# Altium PCB PCB_Mechanicals.PcbDoc
Units mil, origin at the board's own origin, x right, y up, seen from the top; angles counter-clockwise.
Board outline 6000 x 4000 mil, 2 copper layers (Top Layer, Bottom Layer); 45 components, 27 nets, 103 pads, 0 vias.
Unrouted connection lines stored in the file: 4.
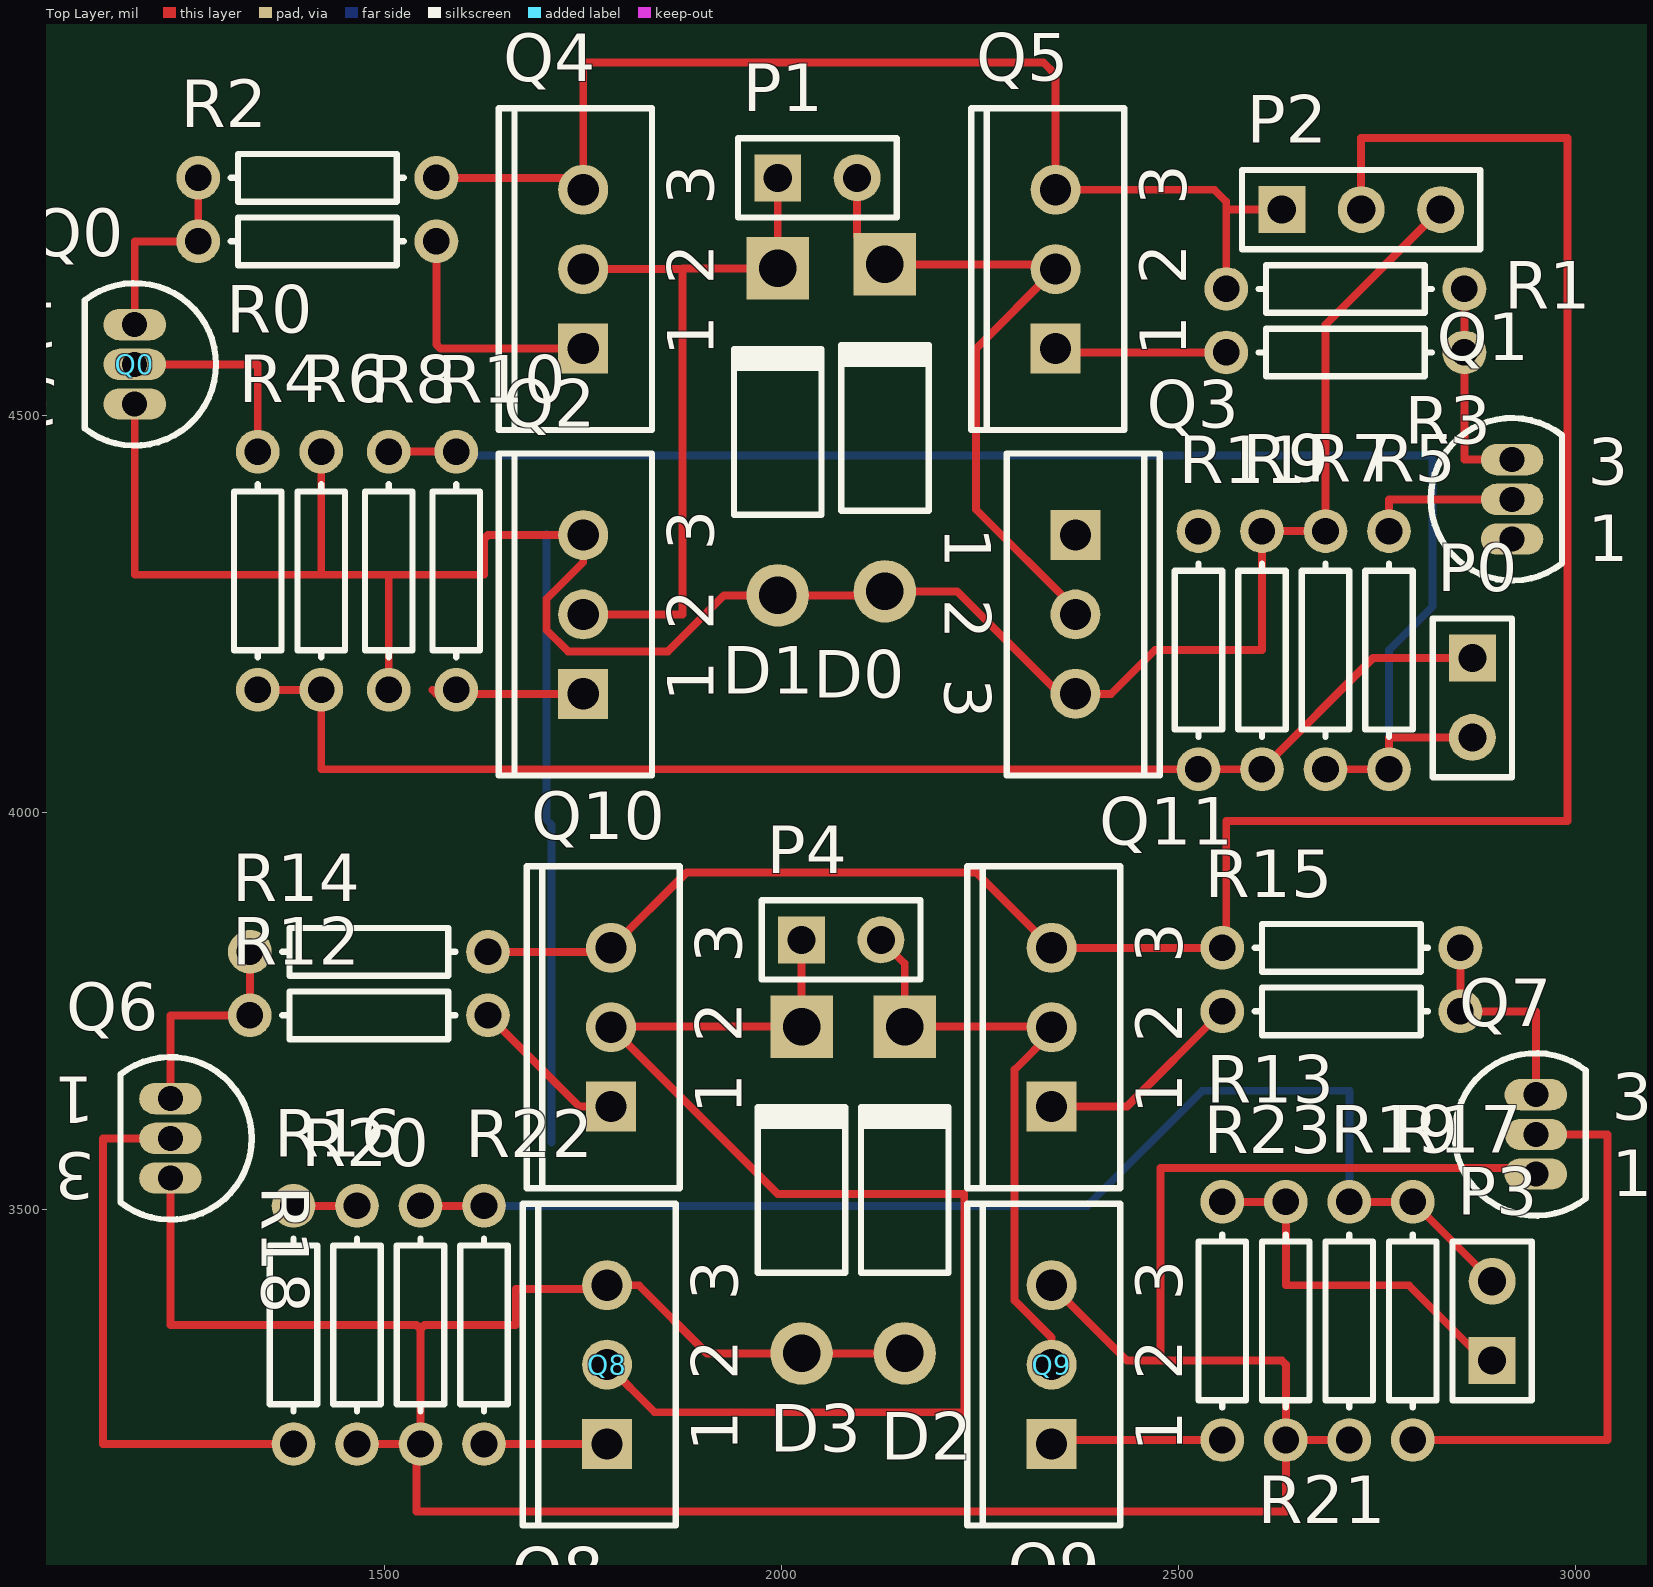
[diagram p0: Top Layer view]
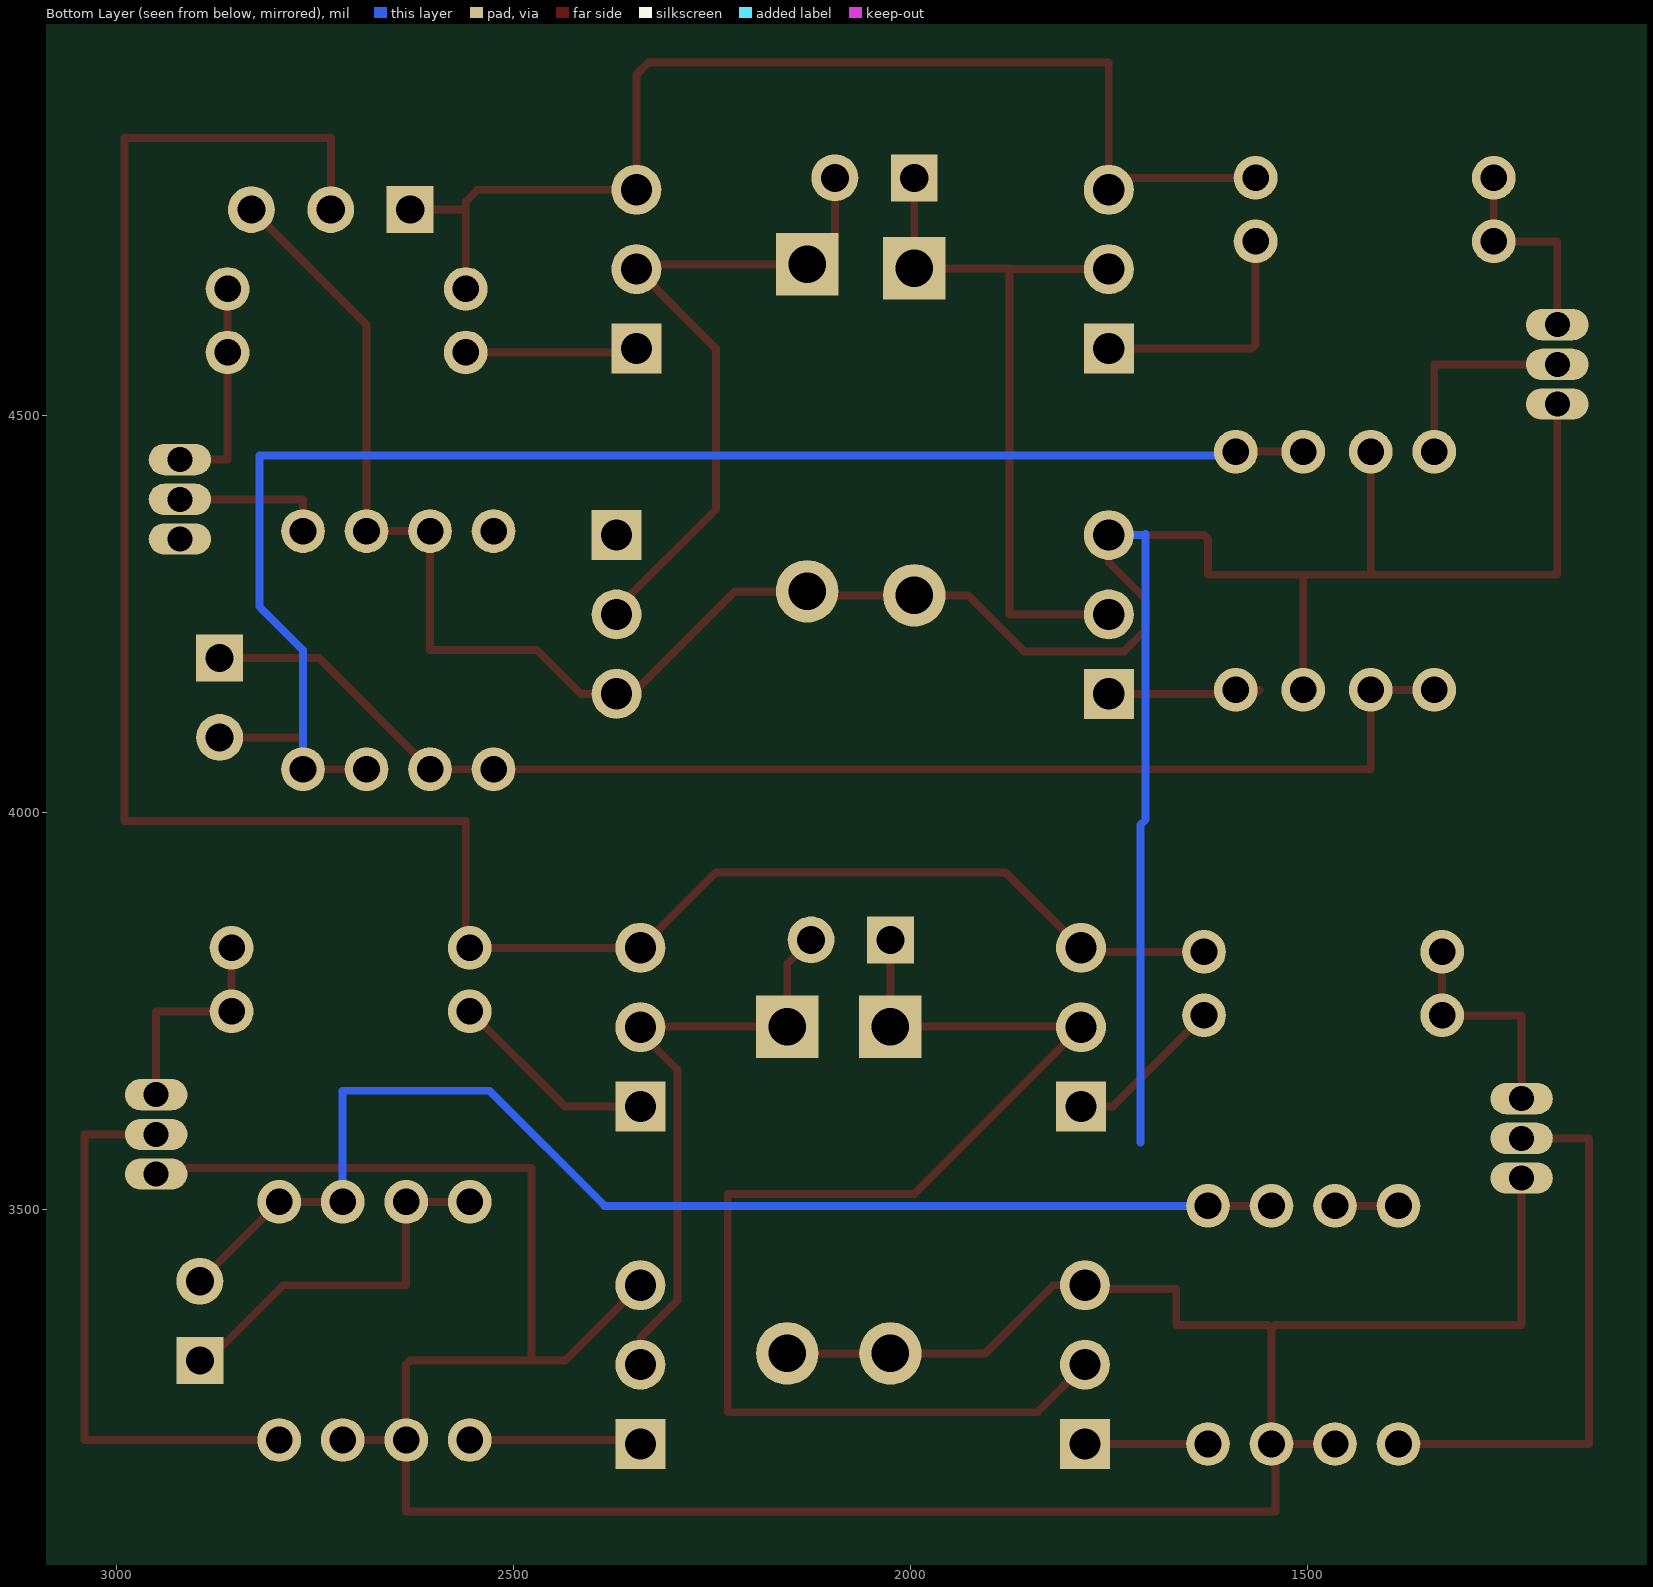
[diagram p1: Bottom Layer view, seen from below]

## Layer stack, top to bottom
Top Solder: solder mask 0.4, Solder Resist, Dk 3.5
Top Layer: signal copper 1.4
Dielectric 1: dielectric 12.6, FR-4, Dk 4.8
Bottom Layer: signal copper 1.4
Bottom Solder: solder mask 0.4, Solder Resist, Dk 3.5

## Board outline
1000,1000 7000,1000 7000,5000 1000,5000

## Design rules (kind name [scope] priority, off if disabled: settings)
Clearance [All] p1: gap=10
PolygonConnect [All] p1: connectstyle=Relief reliefconductorwidth=10 reliefentries=4 polygonreliefangle="90 Angle" airgapwidth=10
RoomDefinition SheetMechanicals [InComponentClass('SheetMechanicals')] p1: confinementstyle=ConfineIn formatcopy=TRUE lockcomponents=FALSE outline 995,2920 3110,2920 3110,4995 995,4995
RoutingVias [All] p1: holewidth=28 width=50 viastyle="Through Hole" minholewidth=28 minwidth=50 maxholewidth=28 maxwidth=50
SolderMaskExpansion [All] p1: expansion=4
Width [All] p1: maxlimit=10 minlimit=10 preferedwidth=10
29 further rules are at their usual default settings.

## Components (designator, comment, footprint, x,y, rotation, side; value= is the part's Value field where it differs from the comment)
D0 "Diode 1N4007" DO-41 2130,4485 r90 top
D1 "Diode 1N4007" DO-41 1995,4480 r90 top
D2 "Diode 1N4007" DO-41 2155,3525 r90 top
D3 "Diode 1N4007" DO-41 2025,3525 r90 top
P0 "Header 1" HDR1X2 2870,4195 r270 top
P1 "Header 2" HDR1X2 1995,4800 r0 top
P2 "Header 3" HDR1X3 2630,4760 r0 top
P3 "Header 4" HDR1X2 2895,3310 r90 top
P4 "Header 5" HDR1X2 2025,3840 r0 top
Q0 "BC337-16" 29-04 1185,4565 r180 top
Q1 "BC337-16" 29-04 2920,4395 r0 top
Q2 "TIP122" 221A-02 1750,4250 r90 top
Q3 "TIP122" 221A-02 2370,4250 r270 top
Q4 "TIP127" 221A-02 1750,4685 r90 top
Q5 "TIP127" 221A-02 2345,4685 r90 top
Q6 "BC337-16" 29-04 1230,3590 r180 top
Q7 "BC337-16" 29-04 2950,3595 r0 top
Q8 "TIP122" 221A-02 1780,3305 r90 top
Q9 "TIP122" 221A-02 2340,3305 r90 top
Q10 "TIP127" 221A-02 1785,3730 r90 top
Q11 "TIP127" 221A-02 2340,3730 r90 top
R0 "Res1" AXIAL-0.3 1415,4720 r0 top
R1 "Res1" AXIAL-0.3 2710,4580 r0 top
R2 "Res1" AXIAL-0.3 1415,4800 r180 top
R3 "Res1" AXIAL-0.3 2710,4660 r180 top
R4 "Res1" AXIAL-0.3 1340,4305 r90 top
R5 "Res1" AXIAL-0.3 2765,4205 r270 top
R6 "Res1" AXIAL-0.3 1420,4305 r270 top
R7 "Res1" AXIAL-0.3 2685,4205 r270 top
R8 "Res1" AXIAL-0.3 1505,4305 r90 top
R9 "Res1" AXIAL-0.3 2605,4205 r270 top
R10 "Res1" AXIAL-0.3 1590,4305 r90 top
R11 "Res1" AXIAL-0.3 2525,4205 r270 top
R12 "Res1" AXIAL-0.3 1480,3745 r0 top
R13 "Res1" AXIAL-0.3 2705,3750 r0 top
R14 "Res1" AXIAL-0.3 1480,3825 r180 top
R15 "Res1" AXIAL-0.3 2705,3830 r180 top
R16 "Res1" AXIAL-0.3 1385,3355 r270 top
R17 "Res1" AXIAL-0.3 2795,3360 r90 top
R18 "Res1" AXIAL-0.3 1465,3355 r90 top
R19 "Res1" AXIAL-0.3 2715,3360 r90 top
R20 "Res1" AXIAL-0.3 1545,3355 r90 top
R21 "Res1" AXIAL-0.3 2635,3360 r90 top
R22 "Res1" AXIAL-0.3 1625,3355 r90 top
R23 "Res1" AXIAL-0.3 2555,3360 r90 top

## Footprints (in the part's own frame and the unit in brackets; to place one, negate y for a bottom-side part, rotate by r counter-clockwise, add the part's x,y. Pads: shape width x height; smd on the part's side, far side on the other; paste and mask are expansions set on the pad)
29-04 [mm] "TO, Flat Index; 3 In-Line, Axial Leads; Body Dia. 4.8mm; Leads 0.48 x 0.5 mm (max)"
  oval 2x1 hole 0.8: 1(0,-1.27) 2(0,0) 3(0,1.27)
  silkscreen extent -2.6,-2.6 1.6,2.6
221A-02 [mm] "TO, Thru-Hole, Vertical, Heatsink Mounted; 3 In-Line Leads; Pitch 2.54 mm"
  rect 1.6x1.6 hole 1: 1(-2.54,0)
  round 1.6 hole 1: 2(0,0) 3(2.54,0)
  silkscreen extent -5.15,-2.2 5.15,2.7
AXIAL-0.3 [mm] "Axial Device, Thru-Hole; 2 Leads; 0.3 in Pin Spacing"
  round 1.4 hole 0.85: 1(-3.81,0) 2(3.81,0)
  silkscreen extent -2.77,-0.76 2.77,0.76
DO-41 [mm] "Diode, Axial; Body 5.2 x 2.7 mm (LxDia. max), Lead Dia. 0.86 mm (max)"
  round 2 hole 1.2: 1(-5.23,0)
  rect 2x2 hole 1.2: 2(5.23,0)
  silkscreen extent -2.65,-1.41 2.75,1.4
HDR1X2 [mm] "Connector; Header; 2 Position"
  rect 1.5x1.5 hole 0.9: 1(0,0)
  round 1.5 hole 0.9: 2(2.54,0)
  silkscreen extent -1.27,-1.27 3.81,1.27
HDR1X3 [mm] "Connector; Header; 3 Position"
  rect 1.5x1.5 hole 0.9: 1(0,0)
  round 1.5 hole 0.9: 2(2.54,0) 3(5.08,0)
  silkscreen extent -1.27,-1.27 6.35,1.27

## Part data
D0 D1 D2 D3: "1 Amp General Purpose Rectifier"
P0 P3 P4: library part "Header 2", "Header, 2-Pin"
P1: "Header, 2-Pin"
P2: "Header, 3-Pin"
Q0 Q1 Q6 Q7: "Amplifier Transistor NPN Silicon"
Q2 Q3 Q8 Q9: "Darlington Silicon Power NPN Transistor, 8 Amp, 100 Volts and 65 Watts"
Q4 Q5 Q10 Q11: "Darlington Silicon Power PNP Transistor, 8 Amp, 100 Volts and 65 Watts"
R0 R1 R2 R3 R4 R5 R6 R7 R8 R9 R10 R11 R12 R13 R14 R15 R16 R17 R18 R19 R20 R21 R22 R23: "Resistor"

## Nets (pads, with @x,y where several pads share a name; then routed paths per layer and width w, separated by ;. In a path a pad name is that pad's centre, name@x,y a point inside that pad or via, vN(x,y) a via of type N, cw(c..) or ccw(c..) an arc to the next point about the centre after c; other vN are vias at no path point)
FORWARD: P0.1 R4.1 R6.2 R9.2 R11.2 | length 1688
  Top Layer w10: R4.1 R6.2 1420,4055 R11.2 R9.2 2745,4195 P0.1
GND: D0.1 D1.1 D2.1 D3.1 P2.3 Q0.3 Q1.1 Q2.3 Q3.3 Q6.3 Q7.1 Q8.3 Q9.3 R6.1 R7.1 R8.1 R9.1 R18.1 R19.1 R20.1 R21.1 | length 7711.3
  Top Layer w10: Q0.3 1185,4300 1420,4300 ; Q6.3 1230,3355 1540,3355 1545,3350 ; R6.1 1420,4300 ; R18.1 R20.1 1545,3350 ; R8.1 1505,4300 ; R20.1@1540,3200 1540,3120 2635,3120 R21.1 ; D2.1 D3.1 1905.91,3319.09 1820,3405 Q8.3 1775,3400 1665,3400 1665,3355 1550,3355 1545,3350 ; Q9.3 2435,3310 2630,3310 2635,3305 R21.1 ; 2477.44,3312.44 2477.44,3552.56 2942.44,3552.56 Q7.1 ; R19.1 R21.1 ; P2.3 2685,4615 R7.1 R9.1 2605,4205 2470,4205 2415,4150 Q3.3 2350,4150 2220.91,4279.09 D0.1 2125,4274.09 D1.1 1927.38,4274.09 1856.79,4203.5 1730.74,4203.5 1703.5,4230.74 1703.5,4269.26 1750,4315.76 Q2.3 1630,4350 1625,4345 1625,4300 1505,4300 ; 1420,4300 1505,4300
  Bottom Layer w10: 1710,3585 1710,3985 1703.5,3991.5 1703.5,4351.5 1705,4350 Q2.3
LEFT: P3.1 R16.1 R18.2 R21.2 R23.2 | length 554.4
  Top Layer w10: R16.1 R18.2 ; R23.2 R21.2 2635,3405 2790,3405 P3.1@2885,3310
NetD0_2: D0.2 P1.2 Q3.2 Q5.2 | length 819.7
  Top Layer w10: D0.2@2095,4725.91 P1.2 ; D0.2 2339.09,4690.91 Q5.2 2245,4585 2245,4382.01 2370,4257.01 Q3.2
NetD1_2: D1.2 P1.1 Q2.2 Q4.2 | length 919.5
  Top Layer w10: Q2.2 1875,4250 1875,4685 ; Q4.2 1875,4685 ; P1.1 D1.2 1875.91,4685.91 1875,4685
NetD2_2: D2.2 P4.2 Q9.2 Q11.2 | length 770.4
  Top Layer w10: P4.2 2155,3810 D2.2 2339.09,3730.91 Q11.2 2340,3722.99 2293.5,3676.5 2293.5,3385.74 2340,3339.24 Q9.2
NetD3_2: D3.2 P4.1 Q8.2 Q10.2 | length 1631.3
  Top Layer w10: Q8.2 1840,3245 2230,3245 2230,3520 1995,3520 Q10.2 1785.91,3730.91 D3.2 P4.1
NetQ0_1: Q0.1 R0.1 R2.2 | length 265
  Top Layer w10: Q0.1 1185,4720 R0.1 R2.2
NetQ0_2: Q0.2 R4.2 | length 265
  Top Layer w10: Q0.2 1340,4565 R4.2
NetQ1_2: Q1.2 R5.1 | length 195
  Top Layer w10: R5.1 2765,4395 Q1.2
NetQ1_3: Q1.3 R1.2 R3.1 | length 275
  Top Layer w10: R3.1 R1.2 2860,4445 Q1.3
NetQ2_1: Q2.1 R10.1 | length 192.1
  Top Layer w10: 1560,4155 1565,4150 Q2.1
NetQ3_1: Q3.1 R11.1
NetQ4_1: Q4.1 R0.2 | length 317.1
  Top Layer w10: R0.2 1565,4590 1570,4585 Q4.1
NetQ5_1: Q5.1 R1.1 | length 217.1
  Top Layer w10: Q5.1 2350,4580 R1.1
NetQ6_1: Q6.1 R12.1 R14.2 | length 285
  Top Layer w10: Q6.1 1230,3745 R12.1 R14.2
NetQ6_2: Q6.2 R16.2 | length 710
  Top Layer w10: Q6.2 1145,3590 1145,3205 R16.2
NetQ7_2: Q7.2 R17.1 | length 720
  Top Layer w10: R17.1 3040,3210 3040,3595 Q7.2
NetQ7_3: Q7.3 R13.2 R15.1 | length 280
  Top Layer w10: R15.1 R13.2 2950,3750 Q7.3
NetQ8_1: Q8.1 R22.1 | length 155
  Top Layer w10: R22.1 Q8.1
NetQ9_1: Q9.1 R23.1 | length 217.1
  Top Layer w10: Q9.1 2345,3210 R23.1
NetQ10_1: Q10.1 R12.2 | length 202.6
  Top Layer w10: R12.2 1745,3630 Q10.1
NetQ11_1: Q11.1 R13.1 | length 264.7
  Top Layer w10: Q11.1 2435,3630 R13.1
REVERSE: P0.2 R5.2 R7.2 R8.2 R10.2 | length 1959.9
  Top Layer w10: R8.2 R10.2 ; R7.2 R5.2 2765,4095 P0.2
  Bottom Layer w10: R10.2 1595,4450 2820,4450 2820,4260 2765,4205 R5.2
RIGHT: P3.2 R17.2 R19.2 R20.2 R22.2 | length 1591.5
  Top Layer w10: R20.2 R22.2 ; R19.2 R17.2 P3.2
  Bottom Layer w10: R22.2 2385,3505 2530,3650 2715,3650 R19.2
VCC: P2.2 Q10.3 Q11.3 R14.1 R15.2 | length 2800.8
  Top Layer w10: R14.1 1780,3825 Q10.3 1880,3925 2245,3925 Q11.3 R15.2 ; R15.2@2560,3835 2560,3990 2990,3990 2990,4850 2730,4850 P2.2
"VCC 9V": P2.1 Q4.3 Q5.3 R2.1 R3.2 | length 1472.4
  Top Layer w10: R2.1 Q4.3@1735,4800 ; Q4.3 1750,4945 2330,4945 2345,4930 Q5.3 2545,4785 2560,4770 R3.2 ; 2565,4760 P2.1

## Text inside footprints (layer, text, board x,y; h text height)
Q0: Top Overlay "1" at 1089.68,4642.91 h59.05 r180; Top Overlay "3" at 1089.68,4546.61 h59.05 r180
Q1: Top Overlay "1" at 3015.32,4317.09 h59.05; Top Overlay "3" at 3015.32,4413.39 h59.05
Q2: Top Overlay "3" at 1914.37,4330.31 h59.06 r90; Top Overlay "2" at 1914.37,4230.31 h59.06 r90; Top Overlay "1" at 1914.37,4140.16 h59.06 r90
Q3: Top Overlay "3" at 2205.63,4169.69 h59.06 r270; Top Overlay "2" at 2205.63,4269.69 h59.06 r270; Top Overlay "1" at 2205.63,4359.84 h59.06 r270
Q4: Top Overlay "3" at 1914.37,4765.31 h59.06 r90; Top Overlay "2" at 1914.37,4665.31 h59.06 r90; Top Overlay "1" at 1914.37,4575.16 h59.06 r90
Q5: Top Overlay "3" at 2509.37,4765.31 h59.06 r90; Top Overlay "2" at 2509.37,4665.31 h59.06 r90; Top Overlay "1" at 2509.37,4575.16 h59.06 r90
Q6: Top Overlay "1" at 1134.68,3667.91 h59.05 r180; Top Overlay "3" at 1134.68,3571.61 h59.05 r180
Q7: Top Overlay "1" at 3045.32,3517.09 h59.05; Top Overlay "3" at 3045.32,3613.39 h59.05
Q8: Top Overlay "3" at 1944.37,3385.32 h59.06 r90; Top Overlay "2" at 1944.37,3285.32 h59.06 r90; Top Overlay "1" at 1944.37,3195.16 h59.06 r90
Q9: Top Overlay "3" at 2504.37,3385.32 h59.06 r90; Top Overlay "2" at 2504.37,3285.32 h59.06 r90; Top Overlay "1" at 2504.37,3195.16 h59.06 r90
Q10: Top Overlay "3" at 1949.37,3810.32 h59.06 r90; Top Overlay "2" at 1949.37,3710.32 h59.06 r90; Top Overlay "1" at 1949.37,3620.16 h59.06 r90
Q11: Top Overlay "3" at 2504.37,3810.32 h59.06 r90; Top Overlay "2" at 2504.37,3710.32 h59.06 r90; Top Overlay "1" at 2504.37,3620.16 h59.06 r90